# Altium PCB altium.pcbdoc
Units mil, origin at the board's own origin, x right, y up, seen from the top; angles counter-clockwise.
Board outline 2409.27 x 3565 mil, 2 copper layers (Top Layer, Bottom Layer); 6 components, 41 nets, 59 pads, 0 vias.
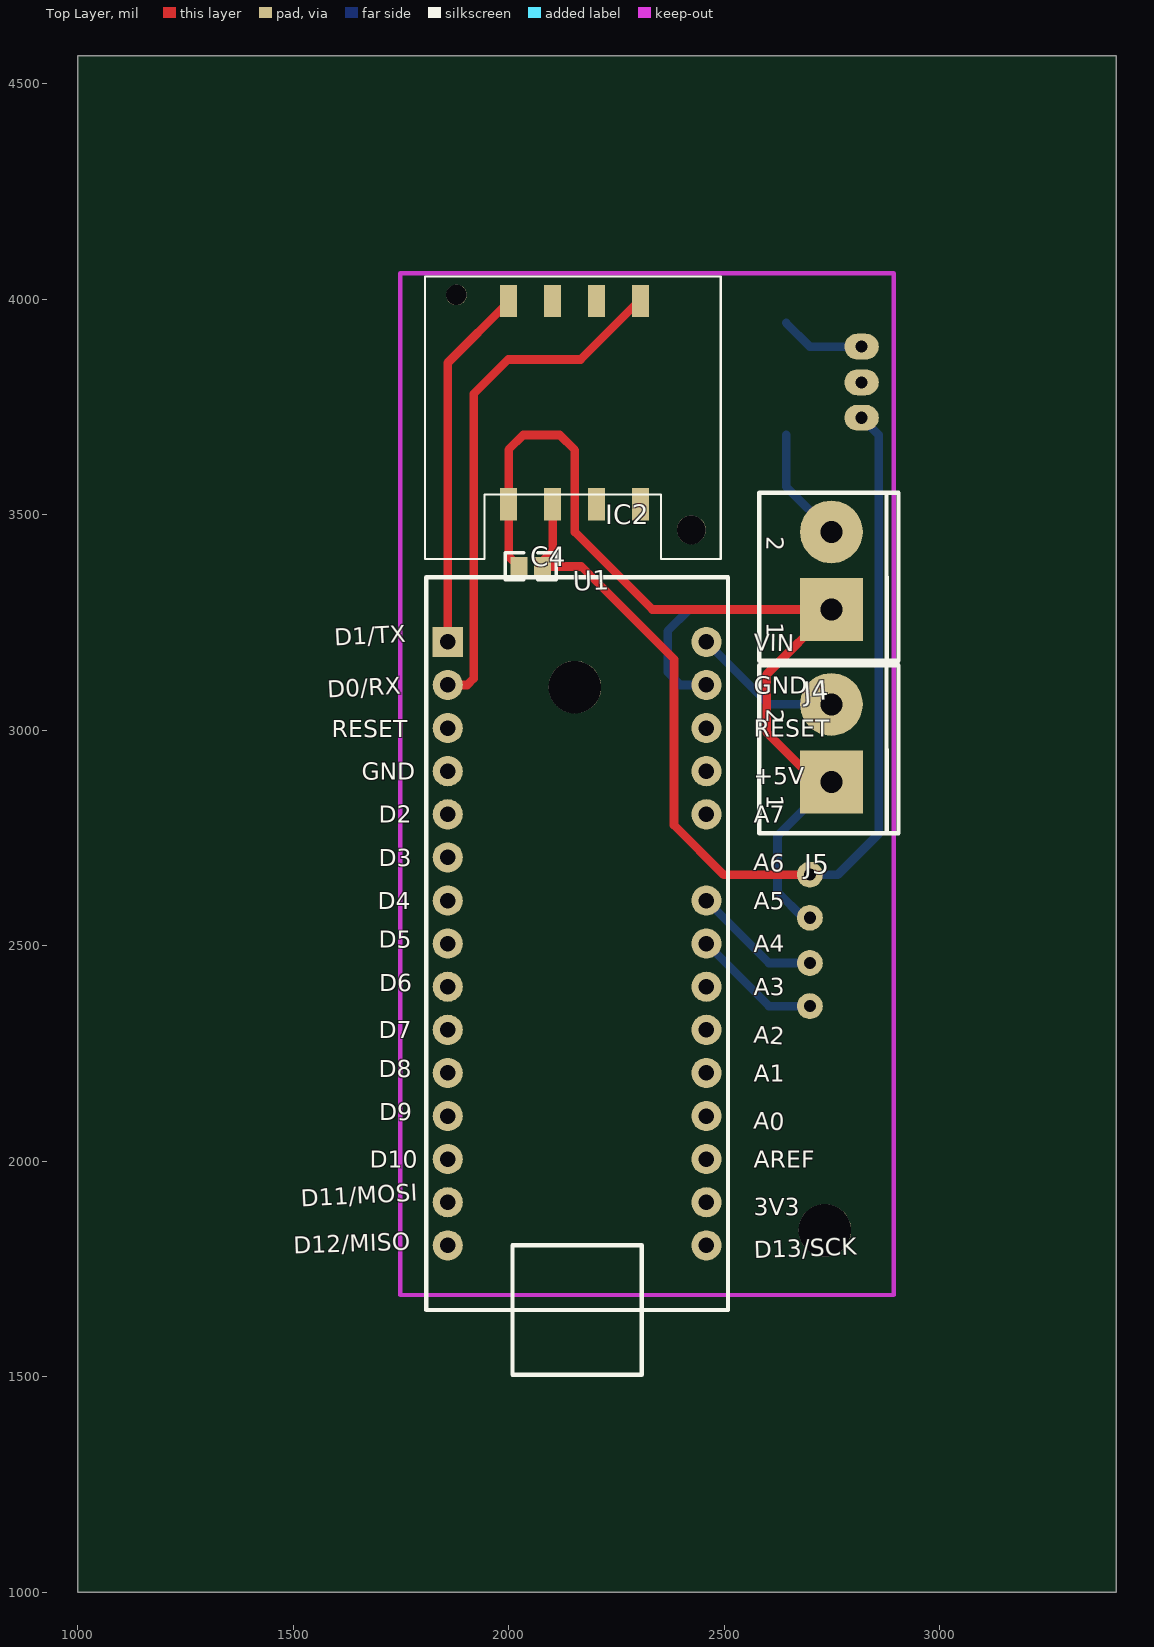
[diagram p0: Top Layer view]
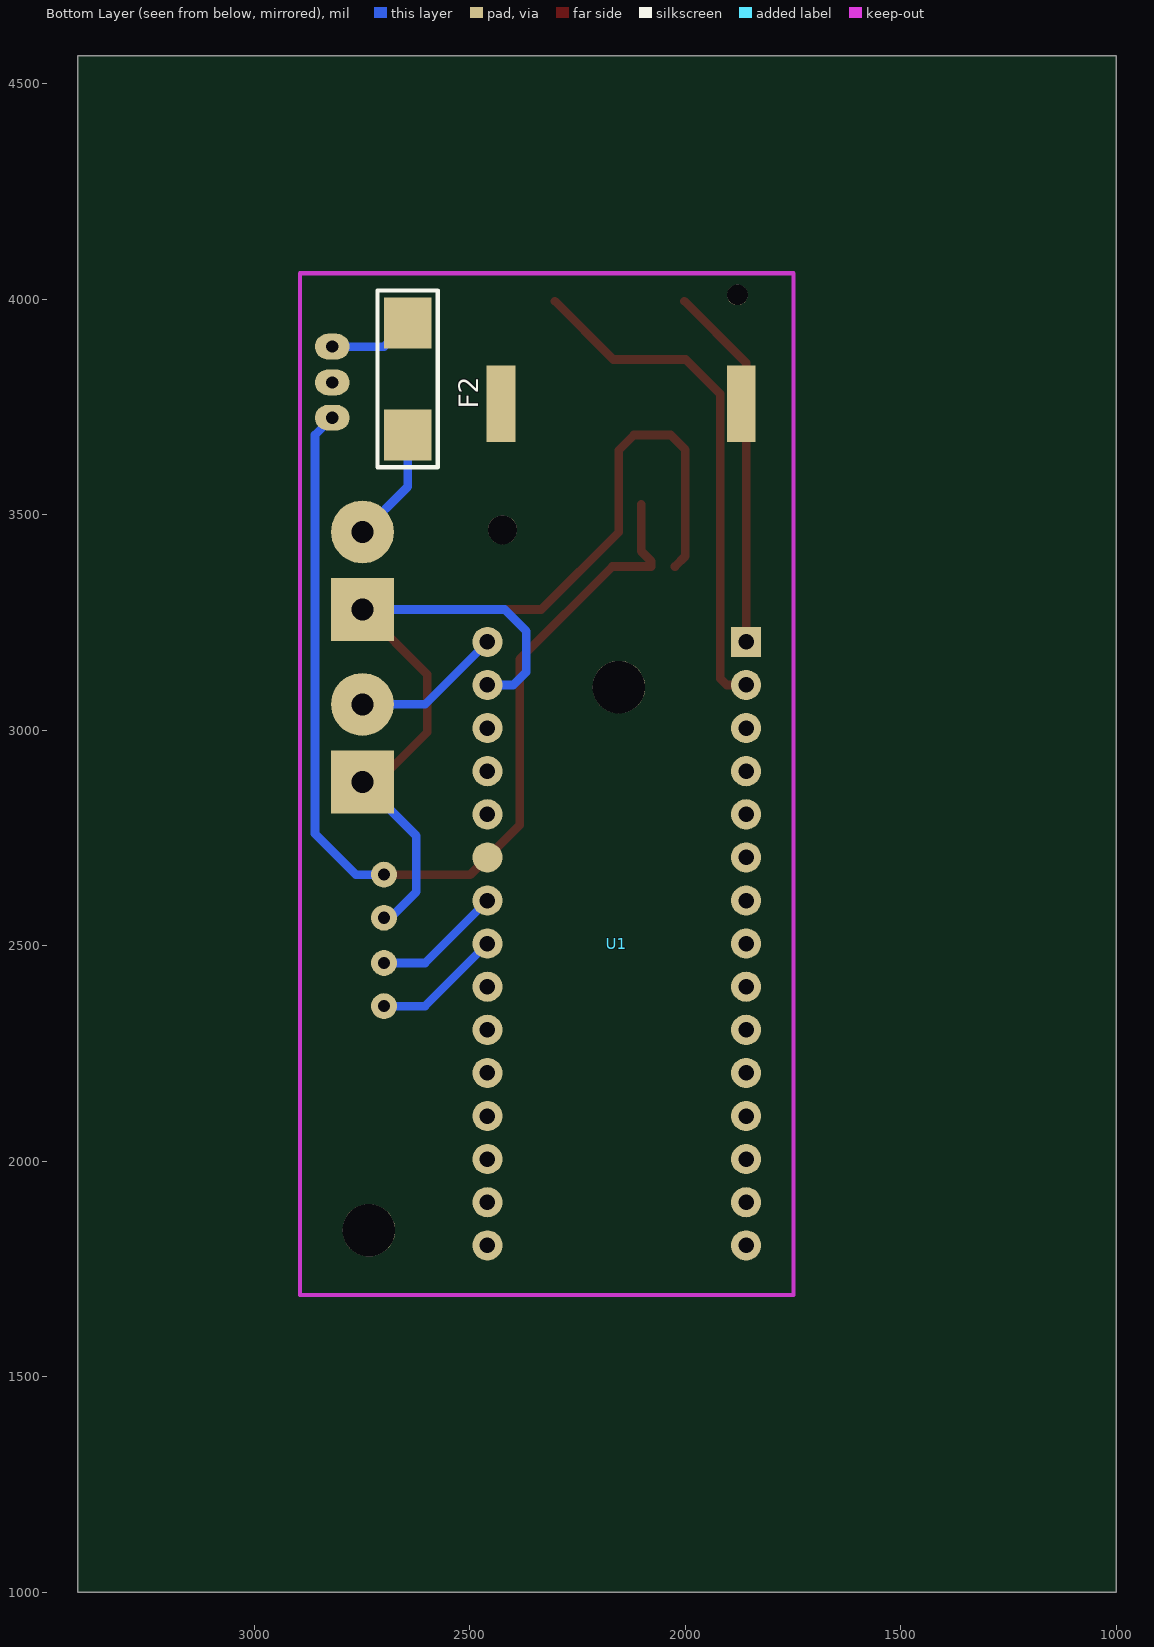
[diagram p1: Bottom Layer view, seen from below]

## Layer stack, top to bottom
Top Layer: signal copper (thickness not stored)
Dielectric: dielectric 12.6, FR-4, Dk 4.8
Bottom Layer: signal copper (thickness not stored)

## Board outline
3409.27,1000 1000,1000 1000,4565 3409.27,4565

## Components (designator, comment, footprint, x,y, rotation, side; value= is the part's Value field where it differs from the comment)
C4 "10nF" 0603 2051.16,3380 r0 top
F2 "NO" OMF_125 2658.6,3785 r90 bottom
IC2 "TR-72D" IQRF_KON-SIM-01 2148.6,3800 r180 top
J4 "KF127_2P_5.08" KF127_2P_5.08 2758.6,3350 r180 top
J5 "KF127_2P_5.08" KF127_2P_5.08 2758.6,2950 r180 top
U1 "ARDUINO_NANO" ARDUINO_NANO 2158.6,2505 r0 top

## Footprints (in the part's own frame and the unit in brackets; to place one, negate y for a bottom-side part, rotate by r counter-clockwise, add the part's x,y. Pads: shape width x height; smd on the part's side, far side on the other; paste and mask are expansions set on the pad)
0603 [mm]
  rect 1x1.1 smd: 1(-0.7,0) 2(0.7,0)
  silkscreen extent -1.5,-0.8 1.5,0.8
ARDUINO_NANO [mil]
  rect 70x70 hole 36: 1(-300,700)
  round 70 hole 36: 2(-300,600) 3(-300,500) 4(-300,400) 5(-300,300) 6(-300,200) 7(-300,100) 8(-300,0) 9(-300,-100) 10(-300,-200) 11(-300,-300) 12(-300,-400) 13(-300,-500) 14(-300,-600) 15(-300,-700) 16(300,-700) 17(300,-600) 18(300,-500) 19(300,-400) 20(300,-300) 21(300,-200) 22(300,-100) 23(300,0) 24(300,100) 26(300,300) 27(300,400) 28(300,500) 29(300,600) 30(300,700)
  round 70 smd far side: 25(300,200)
  silkscreen extent -350,-1000 350,850
IQRF_KON-SIM-01 [mm]
  rect 1x1.9 smd: 1(-4.002,7.002) 2(-1.401,7.002) 3(1.19,7.002) 4(3.781,7.002) 5(-4.002,-4.969) 6(-1.401,-4.969) 7(1.19,-4.969) 8(3.781,-4.969)
  rect 1.7x4.5 smd far side: 9(-7.08,1.07) 9(7.079,1.07)
  silkscreen extent -8.72,-6.43 8.72,10.22
KF127_2P_5.08 [mil]
  rect 145.67x145.67 hole 51.18: 1(10,70)
  round 145.67 hole 51.18: 2(10,-110)
  silkscreen extent -146,-201 177,189
OMF_125 [mm]
  rect 3x2.8 smd: 1(4.064,-0.381) 2(-2.54,-0.381)
  silkscreen extent -4.44,-2.16 5.97,1.4

## Free pads (board coordinates)
  oval 80x60 hole 28: 3(2818.6,3725) 3(2818.6,3807) 3(2818.6,3890)
  round 60 hole 28: 4(2698.6,2360) 4(2698.6,2460) 4(2698.6,2565) 4(2698.6,2665)
  round 48 hole 48 unplated: ""(1878.6,4010)
  round 122 hole 122 unplated: ""(2153.6,3100) ""(2733.6,1840)
  round 67 hole 67 unplated: ""(2423.6,3465)

## Nets (pads, with @x,y where several pads share a name; then routed paths per layer and width w, separated by ;. In a path a pad name is that pad's centre, name@x,y a point inside that pad or via, vN(x,y) a via of type N, cw(c..) or ccw(c..) an arc to the next point about the centre after c; other vN are vias at no path point)
0: pad.3@2818.6,3807
5V: C4.2 IC2.3 pad.3@2818.6,3725 pad.4@2698.6,2665 | length 2476.4
  Top Layer w20: IC2.3 2101.74,3415 2078.72,3391.98 C4.2 2168.6,3380 2383.6,3165 2383.6,2780 2498.6,2665 pad.4@2698.6,2665
  Bottom Layer w20: pad.4@2698.6,2665 2763.6,2665 2858.6,2760 2858.6,3685 pad.3@2818.6,3725
5V-: F2.1 pad.3@2818.6,3890 | length 197.8
  Bottom Layer w20: F2.1 2698.6,3890 pad.3@2818.6,3890
+12V: J5.2 U1.30 | length 350.1
  Bottom Layer w20: U1.30 2603.6,3060 J5.2
C1/BTN1/LEFT: IC2.1
C2/BTN2/RIGHT: IC2.2
C6/DATA: IC2.6
C7/STROBE: IC2.7
GND: C4.1 IC2.4 J4.1 J5.1 pad.4@2698.6,2565 U1.29 | length 2872.5
  Top Layer w20: IC2.4 1999.7,3651.1 2033.6,3685 2118.6,3685 2153.6,3650 2153.6,3460 2333.6,3280 J4.1 2598.6,3130 2598.6,2995 2713.6,2880 J5.1 ; IC2.4 1999.74,3403.86 C4.1
  Bottom Layer w20: U1.29 2398.6,3105 2368.6,3135 2368.6,3230 2418.6,3280 J4.1 ; pad.4@2698.6,2565 2683.6,2565 2623.6,2625 2623.6,2755 J5.1
J4_1: F2.2 J4.2 | length 268.5
  Bottom Layer w20: F2.2 2643.6,3565 J4.2
RX: IC2.5 U1.2 | length 1199
  Top Layer w20: U1.2 1903.6,3105 1918.6,3120 1918.6,3780 1998.6,3860 2166.5,3860 IC2.5@2302.1,3995.6
S$22: 
S$67: 
S$69: 
SCL: pad.4@2698.6,2460 U1.24 | length 300.1
  Bottom Layer w20: U1.24 2603.6,2460 pad.4@2698.6,2460
SDA: pad.4@2698.6,2360 U1.23 | length 300.1
  Bottom Layer w20: U1.23 2603.6,2360 pad.4@2698.6,2360
TX: IC2.8 U1.1 | length 849.9
  Top Layer w20: U1.1 1858.6,3852.49 IC2.8@2001.74,3995.63
U1_3: U1.3
U1_4: U1.4
U1_5: U1.5
U1_6: U1.6
U1_7: U1.7
U1_8: U1.8
U1_9: U1.9
U1_10: U1.10
U1_11: U1.11
U1_12: U1.12
U1_13: U1.13
U1_14: U1.14
U1_15: U1.15
U1_16: U1.16
U1_17: U1.17
U1_18: U1.18
U1_19: U1.19
U1_20: U1.20
U1_21: U1.21
U1_22: U1.22
U1_25: U1.25
U1_26: U1.26
U1_27: U1.27
U1_28: U1.28
pads on no net: IC2.9

## Text inside footprints (layer, text, board x,y; h text height)
J4: Top Overlay "1" at 2598.91,3250 h39.37 r270; Top Overlay "2" at 2598.92,3450.34 h39.37 r269
J5: Top Overlay "1" at 2598.91,2850 h39.37 r270; Top Overlay "2" at 2598.92,3050.34 h39.37 r269
U1: Top Overlay "D1/TX" at 1595.94,3195.93 h40 r3; Top Overlay "GND" at 2568.6,3085 h40; Top Overlay "+5V" at 2568.6,2875 h40; Top Overlay "D12/MISO" at 1501.4,1785.01 h40 r2; Top Overlay "VIN" at 2568.25,3185 h40 r359; Top Overlay "D13/SCK" at 2569.3,1775.01 h40 r2; Top Overlay "GND" at 1658.9,2885 h40; Top Overlay "D0/RX" at 1579.64,3075.93 h40 r3; Top Overlay "RESET" at 1589.5,2983.2 h40; Top Overlay "D2" at 1698.2,2785 h40; Top Overlay "D3" at 1698.2,2685 h40; Top Overlay "D4" at 1696.4,2585 h40; Top Overlay "D5" at 1698.2,2495 h40; Top Overlay "D6" at 1700,2395 h40; Top Overlay "D7" at 1698.2,2285 h40; Top Overlay "D8" at 1698.2,2195 h40; Top Overlay "D9" at 1700,2095 h40; Top Overlay "D10" at 1677.1,1985 h40; Top Overlay "D11/MOSI" at 1518.14,1895.03 h40 r3; Top Overlay "3V3" at 2568.6,1875 h40; Top Overlay "AREF" at 2568.6,1985 h40; Top Overlay "A0" at 2567.55,2075.03 h40 r357; Top Overlay "A1" at 2568.6,2185 h40; Top Overlay "A2" at 2567.2,2275.05 h40 r356; Top Overlay "A3" at 2568.6,2385 h40; Top Overlay "A4" at 2568.95,2485 h40 r1; Top Overlay "A5" at 2568.6,2585 h40; Top Overlay "A6" at 2567.55,2675.03 h40 r357; Top Overlay "A7" at 2568.6,2785 h40; Top Overlay "RESET" at 2568.6,2985 h40